# EAGLE board PCB_v19 (EAGLE 9.7.0)
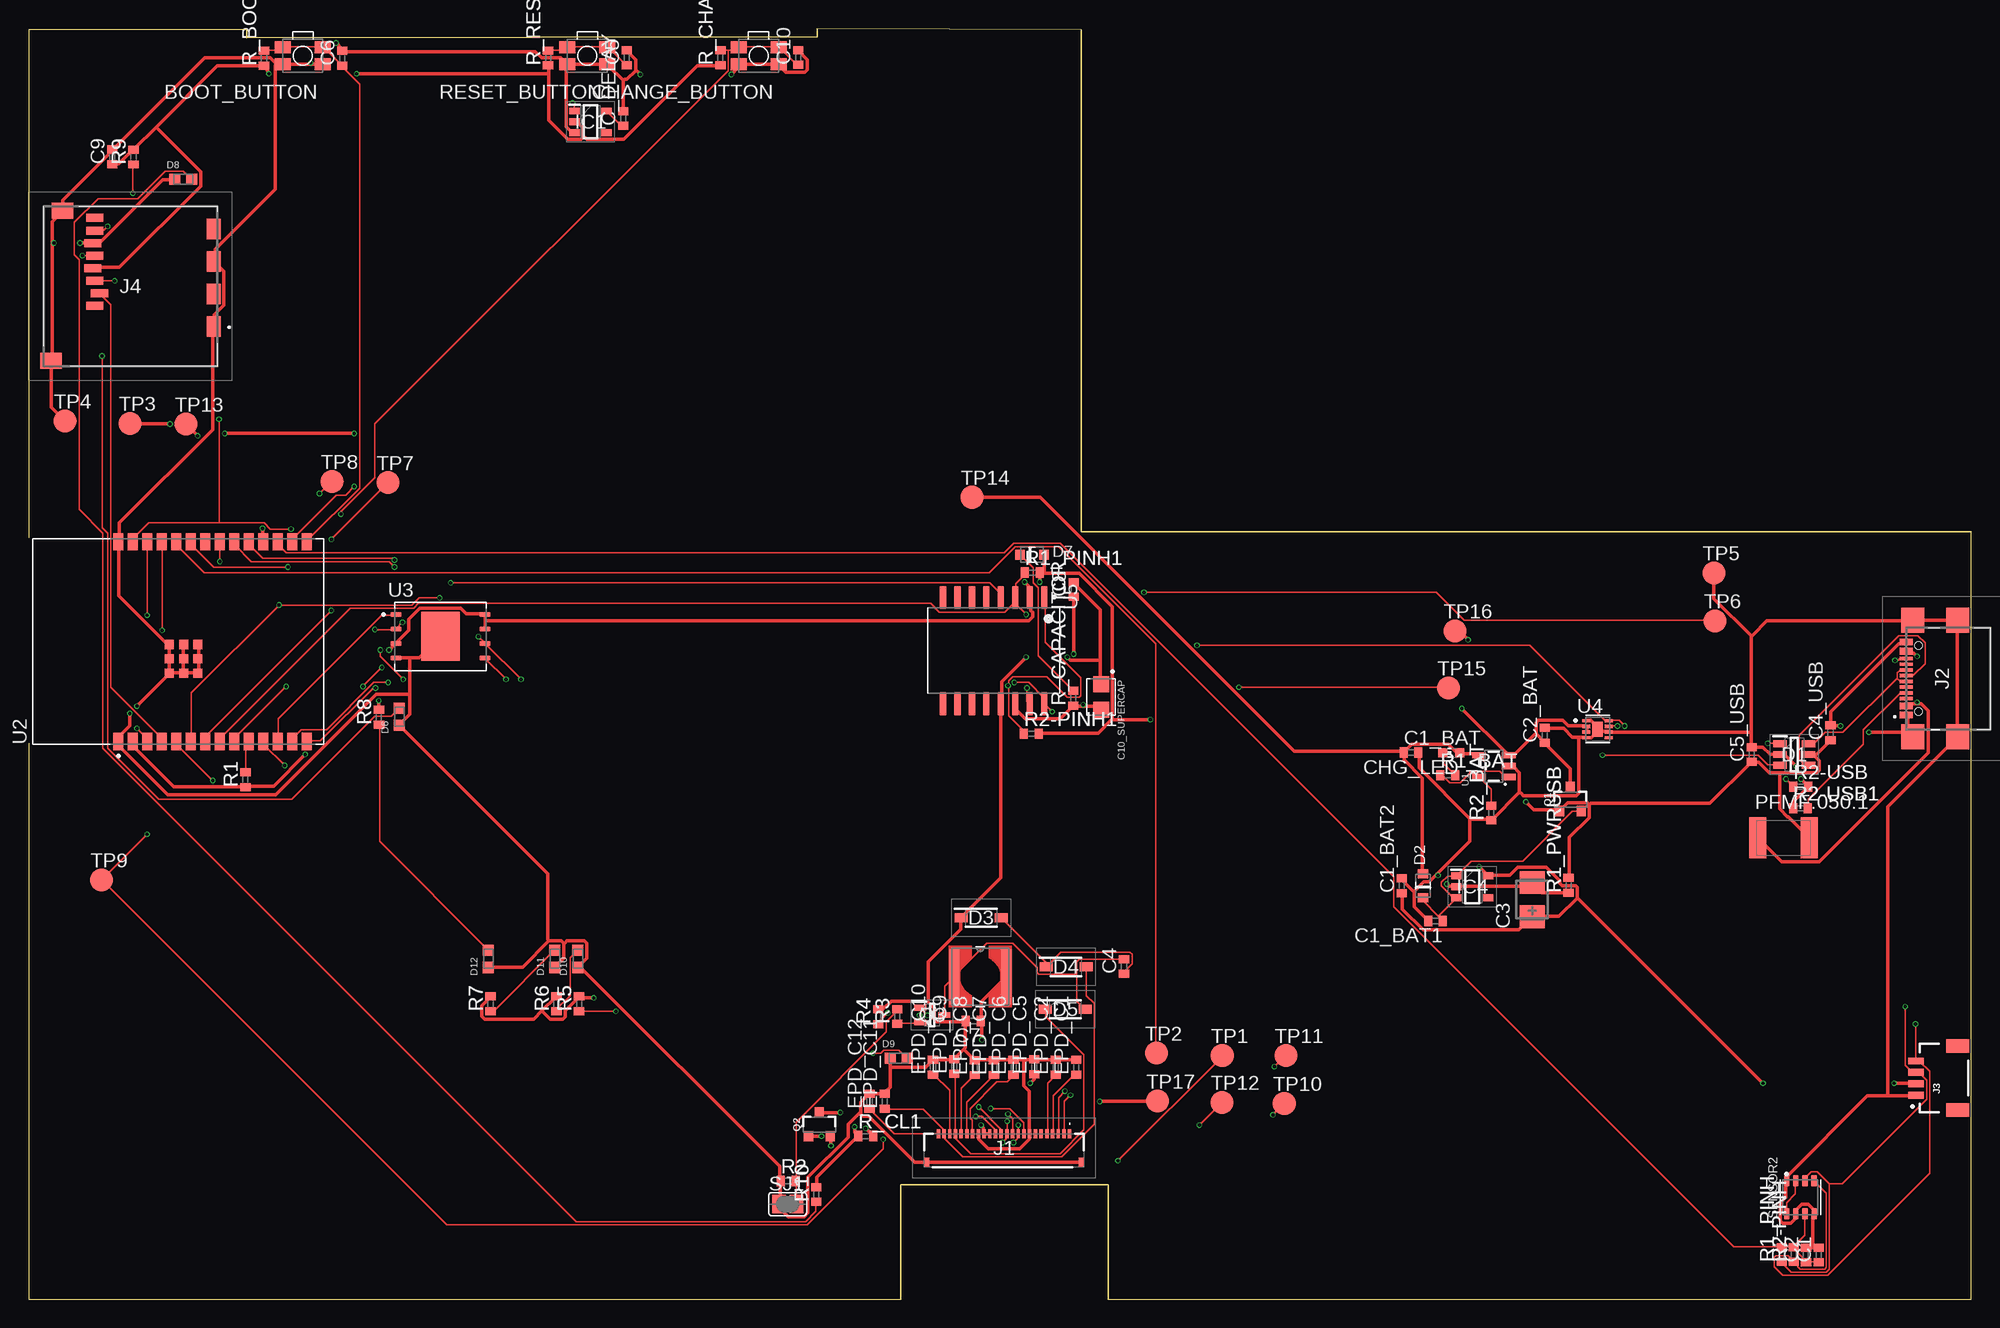
[diagram p0: board, top side]
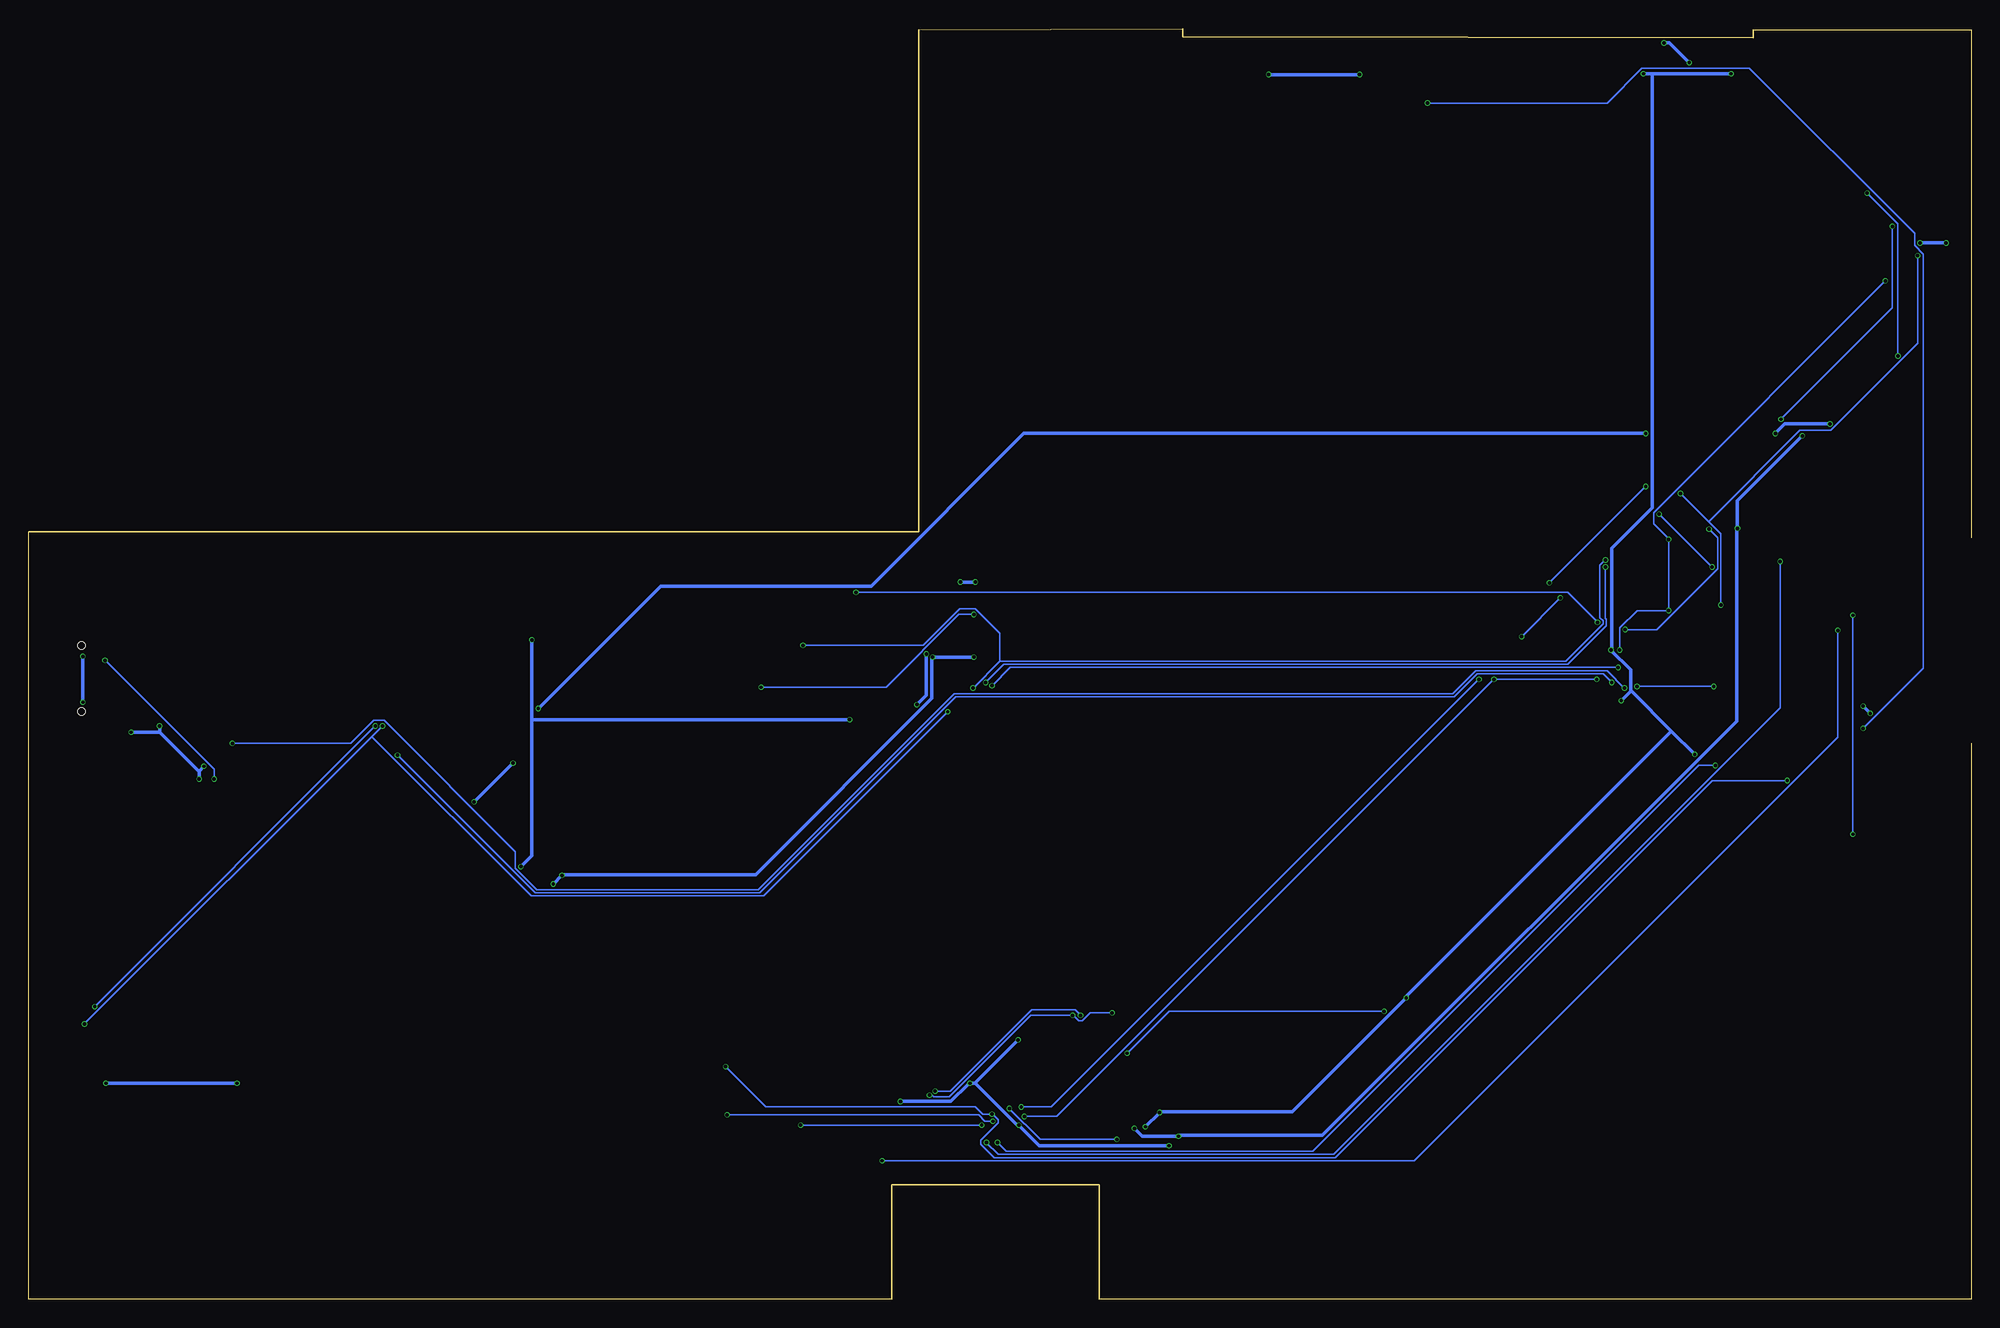
[diagram p1: board, bottom side, seen from below]

Size 170.2 x 111.3 mm. Coordinates in mm from the lower left corner, seen from the top.
Outline: 0,66.7 0,111.2 19.1,111.2 19.1,110.5 69.1,110.6 69.1,111.3 92.2,111.2 92.2,67.2 170.2,67.2 170.2,0 94.6,0 94.6,10 76.4,10 76.4,0 0,0 0,48.7
Copper layers (1*16): Top 0.035mm / dielectric 1.6mm / Bottom 0.035mm
Design rules "jlcpcb-2layers.dru": minimum track width 0.15mm, minimum drill 0.3mm, track to track 5mil, track to pad 5mil, pad to pad 5mil, via to via 5mil, smd to smd 5mil, copper to edge 0.15mm, drill to drill 6mil, minimum pad ring 10mil, minimum via ring 3mil, stop-mask expansion 4mil, vias tented up to drill 0mil, thermal gap 10mil
Net classes: 1 New Class: width 0.3 mm

## Footprints (pad centres in the part's own frame; a part is rotated, then mirrored left to right if it is on the bottom)
MYBUTTON = smd 1.4 x 1.05: 1 1.75,0.75; 2 -1.75,0.75; 3 -1.75,-0.75; 4 1.75,-0.75
EAGLE-LTSPICE_C0402 = smd 0.7 x 0.9: 1 -0.65,0; 2 0.65,0
RCL_CT3528 = smd 2 x 2.2: + -1.5,0; - 1.5,0
ESP32_WROVER_EAGLE-LTSPICE_C0402 = smd 0.7 x 0.9: 1 -0.65,0; 2 0.65,0
CAPCP3225X100N = smd 1.4 x 1.4: 1 -1.1,0; 2 1.1,0
ADAFRUIT_CHIP-LED0603 = smd 0.8 x 0.8: A 0,-0.75; C 0,0.75
SOT95P280X145-6N = smd 1.2 x 0.6: 1 -1.25,0.95; 2 -1.25,0; 3 -1.25,-0.95; 4 1.25,-0.95; 5 1.25,0; 6 1.25,0.95
ESP32_WROVER_AVX---SD0805S020S1R0_AVX_SD0805S020S1R0_0 = smd 0.8 x 0.9: 1 -1.05,0; 2 1.05,0
SOD3716X135N = smd 1.15 x 0.8: 1 -1.75,0; 2 1.75,0
DIOC1608X36N = smd 0.97 x 0.94: 1 -0.75,0; 2 0.75,0
SOT95P280X125-5N = smd 0.9 x 0.6: 1 -1.4,0.95; 2 -1.4,0; 3 -1.4,-0.95; 4 1.4,-0.95; 5 1.4,0.95
SOT95P280X120-5N = smd 0.9 x 0.6: 1 -1.4,0.95; 2 -1.4,0; 3 -1.4,-0.95; 4 1.4,-0.95; 5 1.4,0.95
FH34SRJ24S05SH99 = smd 0.3 x 0.8: 1 5.75,1.45; 2 5.25,1.45; 3 4.75,1.45; 4 4.25,1.45; 5 3.75,1.45; 6 3.25,1.45; 7 2.75,1.45; 8 2.25,1.45; 9 1.75,1.45; 10 1.25,1.45; 11 0.75,1.45; 12 0.25,1.45; 13 -0.25,1.45; 14 -0.75,1.45; 15 -1.25,1.45; 16 -1.75,1.45; 17 -2.25,1.45; 18 -2.75,1.45; 19 -3.25,1.45; 20 -3.75,1.45; 21 -4.25,1.45; 22 -4.75,1.45; 23 -5.25,1.45; 24 -5.75,1.45 | smd 0.4 x 0.8: MP1 6.75,-1.05; MP2 -6.75,-1.05
SAMACSYS_PARTS_USB4110GFA = smd 0.3 x 1.15: A1 -3.35,3.678; A4 -2.55,3.678; A5 -1.25,3.678; A6 -0.25,3.678; A7 0.25,3.678; A8 1.25,3.678; A9 2.55,3.678; A12 3.35,3.678; B1 3.05,3.678; B4 2.25,3.678; B5 1.75,3.678; B6 0.75,3.678; B7 -0.75,3.678; B8 -1.75,3.678; B9 -2.25,3.678; B12 -3.05,3.678 | smd 2.18 x 2: MP1 -5.11,-0.827; MP2 5.11,-0.827; MP3 -5.11,3.103; MP4 5.11,3.103 | hole 0.65: -2.89,2.603; 2.89,2.603
JST04_1MM_RA = smd 0.6 x 1.35: 1 -1.5,0; 2 -0.5,0; 3 0.5,0; 4 1.5,0 | smd 1.2 x 2: NC1 2.8,-3.675; NC2 -2.8,-3.675
112ATAARR03ATTEND = smd 1.8 x 1.2: G1 10.6,10.4; G2 4.9,10.4; S1 7.75,10.4; S2 2.05,10.4 | smd 1.4 x 1.9: G3 13.6,-3.85; G4 0.45,-2.85 | smd 0.7 x 1.5: P1 8.8,0; P2 7.7,0.4; P3 6.6,0; P4 5.5,-0.2; P5 4.4,0; P6 3.3,-0.2; P7 2.2,0; P8 1.1,0
IND_4828-WE-TPC_WRE = smd 0.889 x 4.826: 1 -2.286,0; 2 2.286,0
ESP32C6_VARISTOR_CT/CN1812 = smd 1.5 x 3.6: 1 -2.25,0; 2 2.25,0
ESP32_WROVER_SPARKFUN-DISCRETESEMI_SOT23-3 = smd 0.8 x 0.9: 1 -0.95,-1; 2 0.95,-1; 3 0,1.1
SOT65P210X110-3N = smd 1.05 x 0.5: 1 -1.05,0.65; 2 -1.05,-0.65; 3 1.05,0
ESP32_WROVER_EAGLE-LTSPICE_R0402 = smd 0.7 x 0.9: 1 -0.65,0; 2 0.65,0
ESP32_WROVER_BME680_PSON80P300X300X100-8N = smd 1.016 x 0.5: 1 1.458,1.2; 2 1.458,0.4; 3 1.458,-0.4; 4 1.458,-1.2; 5 -1.458,-1.22; 6 -1.458,-0.4; 7 -1.458,0.4; 8 -1.458,1.2
SJ = smd 1.168 x 1.6: 1 -0.762,0; 2 0.762,0
TP20R = smd 2 x 2: TP 0,0
ESP32_WROVER_SPARKFUN-IC-POWER_SOT23-5 = smd 0.55 x 1.2: 1 -0.95,-1.3; 2 0,-1.3; 3 0.95,-1.3; 4 0.95,1.3; 5 -0.95,1.3
XCVR_ESP32-C6-WROOM-1-N8 = smd 1.5 x 0.9: 1 -8.75,5.26; 2 -8.75,3.99; 3 -8.75,2.72; 4 -8.75,1.45; 5 -8.75,0.18; 6 -8.75,-1.09; 7 -8.75,-2.36; 8 -8.75,-3.63; 9 -8.75,-4.9; 10 -8.75,-6.17; 11 -8.75,-7.44; 12 -8.75,-8.71; 13 -8.75,-9.98; 14 -8.75,-11.25; 15 8.75,-11.25; 16 8.75,-9.98; 17 8.75,-8.71; 18 8.75,-7.44; 19 8.75,-6.17; 20 8.75,-4.9; 21 8.75,-3.63; 22 8.75,-2.36; 23 8.75,-1.09; 24 8.75,0.18; 25 8.75,1.45; 26 8.75,2.72; 27 8.75,3.99; 28 8.75,5.26 | smd 0.8 x 0.8: 29_1 -2.755,0.79; 29_2 -1.505,0.79; 29_3 -0.255,0.79; 29_4 -2.755,-0.46; 29_5 -1.505,-0.46; 29_6 -0.255,-0.46; 29_7 -2.755,-1.71; 29_8 -1.505,-1.71; 29_9 -0.255,-1.71
SON127P600X800X80-9N = smd 0.94 x 0.44: 1 -3.895,1.905; 2 -3.895,0.635; 3 -3.895,-0.635; 4 -3.895,-1.905; 5 3.895,-1.905; 6 3.895,-0.635; 7 3.895,0.635; 8 3.895,1.905 | smd 3.4 x 4.3: 9 0,0
SON50P200X200X80-9N = smd 0.76 x 0.27: 1 -0.985,0.75; 2 -0.985,0.25; 3 -0.985,-0.25; 4 -0.985,-0.75; 5 0.985,-0.75; 6 0.985,-0.25; 7 0.985,0.25; 8 0.985,0.75 | smd 0.9 x 1.3: 9 0,0
SOIC127P1032X265-16N = smd 2.05 x 0.59: 1 -4.655,4.445; 2 -4.655,3.175; 3 -4.655,1.905; 4 -4.655,0.635; 5 -4.655,-0.635; 6 -4.655,-1.905; 7 -4.655,-3.175; 8 -4.655,-4.445; 9 4.655,-4.445; 10 4.655,-3.175; 11 4.655,-1.905; 12 4.655,-0.635; 13 4.655,0.635; 14 4.655,1.905; 15 4.655,3.175; 16 4.655,4.445

## Placement (x,y rotation side)
BOOT_BUTTON  [MYBUTTON]  24.03,108.91 180 top
C1  100nF  [EAGLE-LTSPICE_C0402]  156.82,3.86 90 top
C1_BAT  4.7uF  [EAGLE-LTSPICE_C0402]  121.11,47.88 0 top
C1_BAT1  4.7uF  [EAGLE-LTSPICE_C0402]  123.25,33.12 180 top
C1_BAT2  4.7uF  [EAGLE-LTSPICE_C0402]  120.29,36.22 90 top
C2  100nF  [EAGLE-LTSPICE_C0402]  155.7,3.86 90 top
C2_BAT  4.7uF  [EAGLE-LTSPICE_C0402]  132.82,49.38 90 top
C3  100uF TANT  [RCL_CT3528]  131.71,35 90 top
C4  4.7uF/25V  [EAGLE-LTSPICE_C0402]  95.96,29.14 90 top
C4_USB  100nF  [EAGLE-LTSPICE_C0402]  157.85,49.6 90 top
C5  1uF  [EAGLE-LTSPICE_C0402]  52.41,108.74 90 top
C5_USB  4.7uF  [EAGLE-LTSPICE_C0402]  150.96,47.7 90 top
C6  100nF  [EAGLE-LTSPICE_C0402]  27.48,108.68 90 top
C7  10uF  [EAGLE-LTSPICE_C0402]  82.77,24.36 180 top
C8  100nF  [EAGLE-LTSPICE_C0402]  91.56,62.16 90 top
C9  100nF  [ESP32_WROVER_EAGLE-LTSPICE_C0402]  7.34,100.06 90 top
C10  100nF  [EAGLE-LTSPICE_C0402]  67.42,108.76 90 top
C10_SUPERCAP  CPH3225A  [CAPCP3225X100N]  93.95,52.74 270 top
C_DELAY  100nF  [EAGLE-LTSPICE_C0402]  52.09,103.42 90 top
CHANGE_BUTTON  [MYBUTTON]  63.96,108.91 180 top
CHG_LED  [ADAFRUIT_CHIP-LED0603]  124.64,47.85 90 top
D1  USBLC6-2SC6Y  [SOT95P280X145-6N]  154.68,47.7 0 top
D2  ESP32_WROVER_AVX---SD0805S020S1R0_AVX_SD0805S020S1R0_0_0AVX_SD0805S020S1R0_0_0  [ESP32_WROVER_AVX---SD0805S020S1R0_AVX_SD0805S020S1R0_0]  122.15,36.21 90 top
D3  MBR0530  [SOD3716X135N]  83.45,33.4 0 top
D4  MBR0530  [SOD3716X135N]  90.89,29.1 0 top
D5  MBR0530  [SOD3716X135N]  90.82,25.38 0 top
D6  PGB1010603MR  [DIOC1608X36N]  32.48,51 90 top
D7  SD0805S020S1R0  [ESP32_WROVER_AVX---SD0805S020S1R0_AVX_SD0805S020S1R0_0]  87.9,65.21 0 top
D8  PGB1010603MR  [DIOC1608X36N]  13.56,98.1 0 top
D9  PGB1010603MR  [DIOC1608X36N]  76.24,21.1 0 top
D10  PGB1010603MR  [DIOC1608X36N]  48.12,29.8 90 top
D11  PGB1010603MR  [DIOC1608X36N]  46.1,29.8 90 top
D12  PGB1010603MR  [DIOC1608X36N]  40.28,29.8 90 top
EPD_C1  1uF/50V  [EAGLE-LTSPICE_C0402]  91.77,20.3 90 top
EPD_C2  1uF/50V  [EAGLE-LTSPICE_C0402]  89.98,20.3 90 top
EPD_C5  0.1uF/50V  [EAGLE-LTSPICE_C0402]  88.1,20.34 90 top
EPD_C6  1uF/50V  [EAGLE-LTSPICE_C0402]  86.29,20.3 90 top
EPD_C7  1uF/50V  [EAGLE-LTSPICE_C0402]  84.58,20.28 90 top
EPD_C8  1uF/50V  [EAGLE-LTSPICE_C0402]  82.89,20.28 90 top
EPD_C9  1uF/50V  [EAGLE-LTSPICE_C0402]  81.1,20.38 90 top
EPD_C10  1uF/50V  [EAGLE-LTSPICE_C0402]  79.23,20.32 90 top
EPD_C11  1uF/50V  [EAGLE-LTSPICE_C0402]  75.01,17.32 90 top
EPD_C12  1uF/50V  [EAGLE-LTSPICE_C0402]  73.67,17.32 90 top
IC1  BD5229G-TR  [SOT95P280X125-5N]  49.23,103.12 0 top
IC4  XC6220A331MR-G  [SOT95P280X120-5N]  126.47,36.12 0 top
J1  FH34SRJ-24S-0.5SH_99_  [FH34SRJ24S05SH99]  85.45,13.02 0 top
J2  SAMACSYS_PARTS_USB4110-GF-A  [SAMACSYS_PARTS_USB4110GFA]  168.17,54.36 90 top
J3  QWIIC_RIGHT_ANGLE  [JST04_1MM_RA]  165.32,19.36 90 top
J4  112A-TAAR-R03_ATTEND  [112ATAARR03ATTEND]  5.82,95.81 270 top
L1  68uH  [IND_4828-WE-TPC_WRE]  83.37,28.25 0 top
PFMF.050.1  ESP32C6_VARISTORCN1812  [ESP32C6_VARISTOR_CT/CN1812]  153.74,40.4 0 top
Q1  20V/4.2A/52mΩ/1.4W  [ESP32_WROVER_SPARKFUN-DISCRETESEMI_SOT23-3]  135.06,43.76 0 top
Q2  20V/4.2A/52mΩ/1.4W  [ESP32_WROVER_SPARKFUN-DISCRETESEMI_SOT23-3]  69.28,15.26 0 top
Q3  SI1308EDL-T1-GE3  [SOT65P210X110-3N]  79.15,24.88 0 top
R1  [ESP32_WROVER_EAGLE-LTSPICE_R0402]  19,45.5 90 top
R1_BAT  200  [ESP32_WROVER_EAGLE-LTSPICE_R0402]  124.33,45.88 0 top
R1_PINH  10K  [ESP32_WROVER_EAGLE-LTSPICE_R0402]  153.58,3.9 90 top
R1_PINH1  10K  [ESP32_WROVER_EAGLE-LTSPICE_R0402]  87.92,63.64 0 top
R1_PWRUSB  100K  [ESP32_WROVER_EAGLE-LTSPICE_R0402]  134.91,36.24 90 top
R2  2.2  [ESP32_WROVER_EAGLE-LTSPICE_R0402]  66.55,10.34 0 top
R2-PINH  10K  [ESP32_WROVER_EAGLE-LTSPICE_R0402]  154.64,3.9 90 top
R2-PINH1  10K  [ESP32_WROVER_EAGLE-LTSPICE_R0402]  87.85,49.52 0 top
R2-USB  5k1  [ESP32_WROVER_EAGLE-LTSPICE_R0402]  155.25,44.88 0 top
R2-USB1  5K1  [ESP32_WROVER_EAGLE-LTSPICE_R0402]  155.22,43 0 top
R2_BAT  2K  [ESP32_WROVER_EAGLE-LTSPICE_R0402]  128.14,42.58 90 top
R3  0.47  [ESP32_WROVER_EAGLE-LTSPICE_R0402]  76.09,24.76 90 top
R4  10k  [ESP32_WROVER_EAGLE-LTSPICE_R0402]  74.43,24.74 90 top
R5  10K  [ESP32_WROVER_EAGLE-LTSPICE_R0402]  48.23,25.86 90 top
R6  10K  [ESP32_WROVER_EAGLE-LTSPICE_R0402]  46.25,25.86 90 top
R7  10K  [ESP32_WROVER_EAGLE-LTSPICE_R0402]  40.47,25.86 90 top
R8  10K  [ESP32_WROVER_EAGLE-LTSPICE_R0402]  30.69,50.96 90 top
R9  10K  [ESP32_WROVER_EAGLE-LTSPICE_R0402]  9.19,100.04 90 top
R10  10K  [ESP32_WROVER_EAGLE-LTSPICE_R0402]  69.01,9.16 90 top
R_BOOT  10K  [ESP32_WROVER_EAGLE-LTSPICE_R0402]  20.63,108.7 90 top
R_CAPACITOR  15  [ESP32_WROVER_EAGLE-LTSPICE_R0402]  91.51,52.64 90 top
R_CHANGE  10K  [ESP32_WROVER_EAGLE-LTSPICE_R0402]  60.61,108.74 90 top
R_CL1  10k  [ESP32_WROVER_EAGLE-LTSPICE_R0402]  73.33,14.28 0 top
R_RESET  10K  [ESP32_WROVER_EAGLE-LTSPICE_R0402]  45.51,108.72 90 top
RESET_BUTTON  [MYBUTTON]  48.95,108.91 180 top
SENSOR2  BME688  [ESP32_WROVER_BME680_PSON80P300X300X100-8N]  155.21,8.92 90 top
SJ1  [SJ]  66.5,8.32 0 top
TP1  TPTP20R  [TP20R]  104.57,21.34 0 top
TP2  TPTP20R  [TP20R]  98.79,21.54 0 top
TP3  TPTP20R  [TP20R]  8.89,76.72 0 top
TP4  TPTP20R  [TP20R]  3.21,76.92 0 top
TP5  TPTP20R  [TP20R]  147.63,63.62 0 top
TP6  TPTP20R  [TP20R]  147.75,59.42 0 top
TP7  TPTP20R  [TP20R]  31.47,71.52 0 top
TP8  TPTP20R  [TP20R]  26.59,71.62 0 top
TP9  TPTP20R  [TP20R]  6.41,36.72 0 top
TP10  TPTP20R  [TP20R]  110,17.14 0 top
TP11  TPTP20R  [TP20R]  110.15,21.34 0 top
TP12  TPTP20R  [TP20R]  104.55,17.24 0 top
TP13  TPTP20R  [TP20R]  13.8,76.64 0 top
TP14  TPTP20R  [TP20R]  82.65,70.24 0 top
TP15  TPTP20R  [TP20R]  124.4,53.54 0 top
TP16  TPTP20R  [TP20R]  124.95,58.54 0 top
TP17  TPTP20R  [TP20R]  98.9,17.34 0 top
U1  MCP73831  [ESP32_WROVER_SPARKFUN-IC-POWER_SOT23-5]  128.36,46.69 90 top
U2  ESP32-C6-WROOM-1-N8  [XCVR_ESP32-C6-WROOM-1-N8]  13.13,57.59 90 top
U3  W25Q512JVEIQ  [SON127P600X800X80-9N]  36.09,58.06 0 top
U4  MAX17048G+T10  [SON50P200X200X80-9N]  137.45,49.92 0 top
U5  DS3231SN#  [SOIC127P1032X265-16N]  84.55,56.8 270 top

## Library data of the parts
BOOT_BUTTON CHANGE_BUTTON CHG_LED PFMF.050.1 RESET_BUTTON SJ1 TP1-TP17 = DeskAssistant v19 v1
C1 C1_BAT C1_BAT1 C1_BAT2 C2 C2_BAT C4 C4_USB C5 C5_USB C6-C10 C_DELAY EPD_C1 EPD_C2 EPD_C5-EPD_C12 = DeskAssistant v19 v1; SPICEMODEL: NONE; SPICEPREFIX: C
C3 = DeskAssistant v19 v1; SPICEPREFIX: C
C10_SUPERCAP = DeskAssistant v19 v1; AVAILABILITY: Not in stock; CHECK_PRICES: https://www.snapeda.com/parts/CPH3225A/Seiko+Instruments/view-part/?ref=eda; DESCRIPTION: 11 mF (EDLC) Supercapacitor 3.3 V 1210 (3225 Metric) - -; MF: Seiko Instruments; MP: CPH3225A; PACKAGE: 1210 Seiko; PRICE: None; PURCHASE-URL: https://www.snapeda.com/api/url_track_click_mouser/?unipart_id=562593&manufacturer=Seiko Instruments&part_name=CPH3225A&search_term=None; SNAPEDA_LINK: https://www.snapeda.com/parts/CPH3225A/Seiko+Instruments/view-part/?ref=snap
D1 = DeskAssistant v19 v1; AVAILABILITY: In Stock; CHECK_PRICES: https://www.snapeda.com/parts/USBLC6-2SC6Y/STMicroelectronics/view-part/?ref=eda; DESCRIPTION: 17V Clamp 5A (8/20µs) Ipp Tvs Diode Surface Mount SOT-23-6; MF: STMicroelectronics; MP: USBLC6-2SC6Y; PACKAGE: SOT-23-6 STMicroelectronics; PRICE: None; SNAPEDA_LINK: https://www.snapeda.com/parts/USBLC6-2SC6Y/STMicroelectronics/view-part/?ref=snap
D2 D7 = DeskAssistant v19 v1; CENTROID_NOT_SPECIFIED: No; DATASHEET: http://datasheets.avx.com/schottky.pdf; DIGIKEY_DESCRIPTION: DIODE SCHOTTKY 20V 1A 0805; DIGIKEY_PART_NUMBER: 478-7800-1-ND; LEAD_FREE: yes; MANUFACTURER: SD0805S020S1R0; MF: AVX; MOUSER_PART_NUMBER: 581-SD0805S020S1R0; PACKAGE: 0805 (2012 metric); PREFIX: D; ROHS: yes; TEMPERATURE_RANGE_HIGH: +125°C; TEMPERATURE_RANGE_LOW: -55°C
D3-D5 = DeskAssistant v19 v1; AVAILABILITY: In Stock; CHECK_PRICES: https://www.snapeda.com/parts/MBR0530/Onsemi/view-part/?ref=eda; DESCRIPTION: Diode Schottky 30 V 500mA Surface Mount SOD-123; MF: ON Semiconductor; MP: MBR0530; PACKAGE: SOD-123-2 ON Semiconductor; PRICE: None; PURCHASE-URL: https://www.snapeda.com/api/url_track_click_mouser/?unipart_id=179458&manufacturer=ON Semiconductor&part_name=MBR0530&search_term=None; SNAPEDA_LINK: https://www.snapeda.com/parts/MBR0530/Onsemi/view-part/?ref=snap
D6 D8-D12 = DeskAssistant v19 v1; AVAILABILITY: In Stock; CHECK_PRICES: https://www.snapeda.com/parts/PGB1010603MR/Littelfuse/view-part/?ref=eda; DESCRIPTION: 150V (Typ) Clamp - Ipp Tvs Diode Surface Mount 0603 (1608 Metric); MF: Littelfuse Inc.; MP: PGB1010603MR; PACKAGE: 0603 Littelfuse Inc.; PRICE: None; PURCHASE-URL: https://www.snapeda.com/api/url_track_click_mouser/?unipart_id=5659453&manufacturer=Littelfuse Inc.&part_name=PGB1010603MR&search_term=None; SNAPEDA_LINK: https://www.snapeda.com/parts/PGB1010603MR/Littelfuse/view-part/?ref=snap
IC1 = DeskAssistant v19 v1; DESCRIPTION: Voltage Detector with Adjustable Delay Time: CMOS processes are utilized to develop high precision, low current consumption CMOS reset ICs that allow arbitrary setting of the delay time. The extensive lineup includes both Nch Open Drain and CMOS output types in a wide range of detection voltages (from 2.3V to 6.0V, in 0.1V steps), enabling selection of the ideal solution based on customer requirements. In addition, the entire series is of course both lead-free and RoHS-compliant.; HEIGHT: 1.25mm; MANUFACTURER_NAME: ROHM Semiconductor; MANUFACTURER_PART_NUMBER: BD5229G-TR; MOUSER_PART_NUMBER: 755-BD5229G-TR; MOUSER_PRICE-STOCK: https://www.mouser.co.uk/ProductDetail/ROHM-Semiconductor/BD5229G-TR?qs=4kLU8WoGk0vvnhrrYwdszw%3D%3D
IC4 = DeskAssistant v19 v1; DESCRIPTION: LDO Voltage Regulators; HEIGHT: 1.2mm; MANUFACTURER_NAME: Torex; MANUFACTURER_PART_NUMBER: XC6220A331MR-G; MOUSER_PART_NUMBER: 865-XC6220A331MR-G; MOUSER_PRICE-STOCK: https://www.mouser.co.uk/ProductDetail/Torex-Semiconductor/XC6220A331MR-G?qs=AsjdqWjXhJ8ZSWznL1J0gg%3D%3D
J1 = DeskAssistant v19 v1; DESCRIPTION: 24 Position FFC, FPC Connector Contacts, Top and Bottom 0.020" (0.50mm) Surface Mount, Right Angle; HEIGHT: 1.1mm; MANUFACTURER_NAME: Hirose; MANUFACTURER_PART_NUMBER: FH34SRJ-24S-0.5SH(99); MOUSER_PART_NUMBER: 798-FH34SRJ24S05SH99; MOUSER_PRICE-STOCK: https://www.mouser.co.uk/ProductDetail/Hirose-Connector/FH34SRJ-24S-0.5SH99?qs=vcbW%252B4%252BSTIpKBl5ap9J8Fw%3D%3D
J2 = DeskAssistant v19 v1; DESCRIPTION: CONN USB 2.0 TYPE-C R/A SMT; HEIGHT: 3.26mm; MANUFACTURER_NAME: GCT (GLOBAL CONNECTOR TECHNOLOGY); MANUFACTURER_PART_NUMBER: USB4110-GF-A; MOUSER_PART_NUMBER: 640-USB4110-GF-A; MOUSER_PRICE-STOCK: https://www.mouser.co.uk/ProductDetail/GCT/USB4110-GF-A?qs=KUoIvG%2F9IlYiZvIXQjyJeA%3D%3D
J3 = DeskAssistant v19 v1; PROD_ID: CONN-13694
J4 = DeskAssistant v19 v1; DESCRIPTION: Micro SD Card Socket, Push-Push Type, Top Mount, SMT, H=1.83mm, 10u; HEIGHT: 1.9mm; MANUFACTURER_NAME: ATTEND; MANUFACTURER_PART_NUMBER: 112A-TAAR-R03 ATTEND
L1 = DeskAssistant v19 v1; COPYRIGHT: Copyright (C) 2024 Ultra Librarian. All rights reserved.; MANUFACTURER_PART_NUMBER: 744043680; MFR_NAME: Wurth Electronics
Q1 Q2 = DeskAssistant v19 v1; MANUFACTURER: DMG2305UX-7; PROD_ID: TRAN-14388
Q3 = DeskAssistant v19 v1; AVAILABILITY: In Stock; CHECK_PRICES: https://www.snapeda.com/parts/SI1308EDL-T1-GE3/Vishay+Siliconix/view-part/?ref=eda; DESCRIPTION: Si1308EDL-T1-GE3 N-channel MOSFET Transistor, 1.5 A, 30 V, 3-Pin SC-70 | Siliconix / Vishay SI1308EDL-T1-GE3; MF: Vishay Siliconix; MP: SI1308EDL-T1-GE3; PACKAGE: SOT-323 Vishay Semiconductor; PRICE: None; PURCHASE-URL: https://www.snapeda.com/api/url_track_click_mouser/?unipart_id=274603&manufacturer=Vishay Siliconix&part_name=SI1308EDL-T1-GE3&search_term=None; SNAPEDA_LINK: https://www.snapeda.com/parts/SI1308EDL-T1-GE3/Vishay+Siliconix/view-part/?ref=snap
R1 R1_BAT R1_PINH R1_PINH1 R1_PWRUSB R2 R2-PINH R2-PINH1 R2-USB R2-USB1 R2_BAT R3-R10 R_BOOT R_CAPACITOR R_CHANGE R_CL1 R_RESET = DeskAssistant v19 v1; SPICEMODEL: NONE; SPICEPREFIX: R
SENSOR2 = DeskAssistant v19 v1; AVAILABILITY: Unavailable; DESCRIPTION: Integrated Environmental Unit; MF: Bosch Sensortec; MP: BME680; PACKAGE: LGA-8 Bosch Tools; PRICE: None
U1 = DeskAssistant v19 v1; PROD_ID: IC-09995
U2 = DeskAssistant v19 v1; AVAILABILITY: In Stock; CHECK_PRICES: https://www.snapeda.com/parts/ESP32-C6-WROOM-1-N8/Espressif+Systems/view-part/?ref=eda; DESCRIPTION: Multiprotocol Modules ESP32-C6 module, Wi-Fi 6 in 2.4 GHz band, Bluetooth 5, Zigbee 3.0 and Thread. ESP34-WROOM Compatible - ENGINEERING SAMPLE; MF: Espressif Systems; MP: ESP32-C6-WROOM-1-N8; PACKAGE: None; PRICE: None; SNAPEDA_LINK: https://www.snapeda.com/parts/ESP32-C6-WROOM-1-N8/Espressif+Systems/view-part/?ref=snap
U3 = DeskAssistant v19 v1; AVAILABILITY: In Stock; CHECK_PRICES: https://www.snapeda.com/parts/W25Q512JVEIQ/Winbond+Electronics/view-part/?ref=eda; DESCRIPTION: FLASH - NOR Memory IC 512Mb (64M x 8) SPI - Quad I/O 133 MHz 8-WSON (8x6); MF: Winbond Electronics; MP: W25Q512JVEIQ; PACKAGE: Package; PRICE: None; SNAPEDA_LINK: https://www.snapeda.com/parts/W25Q512JVEIQ/Winbond+Electronics/view-part/?ref=snap
U4 = DeskAssistant v19 v1; AVAILABILITY: In Stock; CHECK_PRICES: https://www.snapeda.com/parts/MAX17048G+T10/Analog+Devices/view-part/?ref=eda; DESCRIPTION: 3µA 1-Cell/2-Cell Fuel Gauge with ModelGauge; MF: Analog Devices; MP: MAX17048G+T10; PACKAGE: TDFN-8 Maxim; PRICE: None; PURCHASE-URL: https://www.snapeda.com/api/url_track_click_mouser/?unipart_id=329239&manufacturer=Analog Devices&part_name=MAX17048G+T10&search_term=None; SNAPEDA_LINK: https://www.snapeda.com/parts/MAX17048G+T10/Analog+Devices/view-part/?ref=snap
U5 = DeskAssistant v19 v1; AVAILABILITY: In Stock; CHECK_PRICES: https://www.snapeda.com/parts/DS3231SN%23/Analog+Devices/view-part/?ref=eda; DESCRIPTION: Extremely Accurate I²C-Integrated RTC/TCXO/Crystal; MF: Analog Devices; MP: DS3231SN#; PACKAGE: SOIC-16 Maxim; PRICE: None; PURCHASE-URL: https://www.snapeda.com/api/url_track_click_mouser/?unipart_id=99048&manufacturer=Analog Devices&part_name=DS3231SN#&search_term=None; SNAPEDA_LINK: https://www.snapeda.com/parts/DS3231SN%23/Analog+Devices/view-part/?ref=snap

## Nets
3V3 [New Class]: C1_BAT2.1 C3.+ C9.1 D7.2 IC1.2 IC4.5 J3.2 J4.P4 Q2.3 R1.1 R1_PINH1.2 R2-PINH1.2 R5.2 R6.2 R7.2 R8.2 R9.2 R10.2 R_BOOT.1 R_CHANGE.1 R_CL1.1 R_RESET.1 TP16.TP U2.2 U3.3 U3.7 U3.8 U5.2
32KHZ: R2-PINH1.1 U2.9 U5.1
DN: D1.4 J2.A7
DP: D1.6 J2.A6 J2.B6
EPD_3V3 [New Class]: C7.1 EPD_C5.1 J1.15 J1.16 L1.2 Q2.2 TP17.TP
EPD_3V3_C [New Class]: Q2.1 R_CL1.2 TP13.TP U2.18
EPD_BUSY: J1.9 TP9.TP U2.26
EPD_CS: J1.12 TP10.TP U2.11
EPD_DC: J1.11 TP11.TP U2.5
EPD_RST: J1.10 TP12.TP U2.21
FLASH_CS: U2.12 U3.1
GDR: J1.2 Q3.1 R4.1
GND: BOOT_BUTTON.1 BOOT_BUTTON.2 C1.2 C1_BAT1.2 C1_BAT2.2 C1_BAT.2 C2.2 C2_BAT.2 C3.- C4_USB.2 C5.2 C5_USB.2 C6.2 C7.2 C8.2 C9.2 C10.2 C10_SUPERCAP.1 C_DELAY.2 CHANGE_BUTTON.1 CHANGE_BUTTON.2 D1.2 D3.1 D6.1 D8.1 D9.1 D10.1 D11.1 D12.1 EPD_C1.2 EPD_C2.2 EPD_C5.2 EPD_C6.2 EPD_C7.2 EPD_C8.2 EPD_C9.2 EPD_C10.2 EPD_C11.2 EPD_C12.2 IC1.3 IC4.2 J1.8 J1.17 J1.MP1 J1.MP2 J2.A1 J2.A12 J2.B1 J2.B12 J2.MP1 J2.MP2 J2.MP3 J2.MP4 J3.1 J4.G1 J4.G2 J4.G3 J4.G4 J4.P6 R1_PWRUSB.1 R2-USB1.1 R2-USB.2 R2.1 R2_BAT.1 R4.2 RESET_BUTTON.1 RESET_BUTTON.2 SENSOR2.1 SENSOR2.5 SENSOR2.7 SJ1.1 TP4.TP TP5.TP U1.2 U2.1 U2.28 U2.29_1 U2.29_2 U2.29_3 U2.29_4 U2.29_5 U2.29_6 U2.29_7 U2.29_8 U2.29_9 U3.4 U3.9 U4.1 U4.4 U4.6 U4.9 U5.13
GPIO8: R1.2 U2.10
I2C_PW: C1.1 C2.1 R1_PINH.2 R2-PINH.2 SENSOR2.6 U2.17
INT_RTC: R1_PINH1.1 TP15.TP U2.8 U5.3
IO/BOOT: BOOT_BUTTON.3 BOOT_BUTTON.4 C6.1 R_BOOT.2 U2.15
IO/CHANGE: C10.1 CHANGE_BUTTON.3 CHANGE_BUTTON.4 R_CHANGE.2 U2.23
MISO: J4.P7 TP6.TP U2.27 U3.2
MOSI: J1.14 J4.P3 TP7.TP U2.7 U3.5
N$1: J2.A5 R2-USB1.2
N$2: C1_BAT1.1 D2.1 IC4.1 IC4.3 Q1.2
N$3: R1_BAT.1 U1.1
N$4: C4.1 D3.2 D4.1
N$5: CHG_LED.C R1_BAT.2
N$6: EPD_C12.1 J1.24
N$7: R2_BAT.2 U1.5
N$8: SENSOR2.2 SENSOR2.8
N$9: C_DELAY.1 IC1.5
N$10: EPD_C10.1 J1.22
N$11: EPD_C8.1 J1.20
N$12: J2.B7
N$13: EPD_C7.1 J1.19
N$14: J2.B5 R2-USB.1
N$15: EPD_C6.1 J1.18
N$16: D8.2 R10.1
N$17: D6.2 R9.1
N$18: C5.1 R_RESET.2 RESET_BUTTON.3 RESET_BUTTON.4
N$19: D9.2 R5.1
N$20: D10.2 R6.1
N$21: D11.2 R7.1
N$22: D12.2 R8.1
N$23: EPD_C2.1 J1.5
N$24: EPD_C1.1 J1.4
N$32: D7.1 R_CAPACITOR.2
PREVGH: D5.1 EPD_C9.1 J1.21
PREVGL: D4.2 EPD_C11.1 J1.23
RESE: J1.3 Q3.2 R3.1
RESE': R2.2 R3.2 SJ1.2
RESET: IC1.1 U2.3
RTC_RST: U2.16 U5.4
RX: TP2.TP U2.24
SCK: J1.13 J4.P5 TP8.TP U2.6 U3.6
SCL: J3.4 R2-PINH.1 SENSOR2.4 U2.20 U4.7 U5.16
SDA: J3.3 R1_PINH.1 SENSOR2.3 U2.19 U4.8 U5.15
SRC: C4.2 D5.2 L1.1 Q3.3
SS_SD: J4.P2 U2.4
TX: TP1.TP U2.25
USB_D+: D1.1 U2.14
USB_D-: D1.3 U2.13
VBAT: C2_BAT.1 Q1.3 TP3.TP U1.3 U4.2 U4.3
VBUS [New Class]: C1_BAT.1 C4_USB.1 C5_USB.1 CHG_LED.A D1.5 D2.2 PFMF.050.1.2 Q1.1 R1_PWRUSB.2 TP14.TP U1.4
VRTC: C8.1 C10_SUPERCAP.2 R_CAPACITOR.1 U5.14
VUSB [New Class]: J2.A4 J2.A9 J2.B4 J2.B9 PFMF.050.1.1

## Tracks (layer width: path | path; a pad name or v marks a point on that pad's centre or on a via)
3V3  (via drill 0.3)
  Top 0.3: 94.94,50.83 93.69,49.58 88.5,49.58 R2-PINH1.2 | 94.94,50.83 94.94,60.66 92.03,63.57 88.99,63.57 | 88.99,63.57 88.57,63.57 R1_PINH1.2 88.57,63.43 v88.57,62.81 | 88.99,63.57 88.99,65.16 D7.2 | v87.25,62.81 87.67,62.39 87.67,61.49 U5.2 87.81,61.35 87.81,60.32 87.95,60.18 87.95,59.76 87.6,59.42 40.03,59.42 | C1_BAT2.1 120.36,35.52 120.36,34.14 122.16,32.34 130.54,32.34 131.64,33.45 C3.+ 131.85,33.52 134.07,33.52 135.66,35.11 | 135.66,35.11 135.66,36.08 135.52,36.22 134.34,36.22 134.14,36.42 134.14,36.63 132.96,37.81 130.47,37.81 129.77,37.12 127.91,37.12 IC4.5 127.77,37.19 v127.07,37.88 | v163.43,18.91 165.3,18.91 J3.2 | v151.94,18.91 135.8,35.04 135.66,35.11 | v126.1,57.76 125.34,58.52 125,58.52 TP16.TP | v98.27,50.76 95.08,50.76 94.94,50.83 | 48.61,101.8 48.61,102.56 48.06,103.11 47.85,103.11 IC1.2 | 48.61,101.8 48.41,101.59 47.23,101.59 45.57,103.25 45.57,107.34 | 45.57,107.34 45.57,108.03 R_RESET.1 | R_CHANGE.1 60.59,108.03 58.59,108.03 52.15,101.59 48.89,101.59 48.75,101.73 48.61,101.8 | C9.1 7.34,99.44 7.89,99.44 9.14,100.69 R9.2 9.28,100.76 11.18,102.66 | 11.18,102.66 16.55,108.03 20.57,108.03 R_BOOT.1 20.64,107.89 21.05,107.48 v21.05,107.34 | 11.18,102.66 15.1,98.75 15.1,97.5 7.96,90.37 5.68,90.37 J4.P4 | v28.74,107.34 45.57,107.34 | U2.2 9.14,48.82 9.14,48.48 12.74,44.87 18.97,44.87 R1.1 19.11,44.94 21.47,44.94 v24.24,47.71 | 40.03,59.42 40.03,59.9 U3.8 39.89,60.04 38.36,60.04 37.88,60.52 34.28,60.52 33.31,59.55 33.31,58.59 32.27,57.55 U3.3 32.13,57.41 v31.58,56.85 | 40.03,59.42 40.03,58.72 U3.7 | v30.68,52.42 30.68,51.66 R8.2 | 44.98,25.24 46.19,26.45 R6.2
  Top 0.3: 44.98,25.24 44.25,24.52 39.96,24.52 39.68,24.79 39.68,25.69 40.44,26.45 R7.2 | 44.98,25.24 45.7,24.52 46.81,24.52 47.02,24.72 47.02,25.28 48.2,26.45 R5.2 48.34,26.38 v49.51,26.38 | R10.2 69.04,9.83 69.04,10.66 72.64,14.27 R_CL1.1 72.57,14.4 72.37,14.61 v72.37,15.1 | v71.12,16.34 69.32,16.34 Q2.3
  Bottom 0.3: v88.57,62.81 v87.25,62.81 | v151.94,18.91 v163.43,18.91 | 126.1,50.76 126.1,38.85 v127.07,37.88 | 126.1,50.76 v126.1,57.76 | 126.1,50.76 v98.27,50.76 | v21.05,107.34 27.98,107.34 | 27.98,107.34 v28.74,107.34 | 29.85,53.25 v30.68,52.42 | 29.85,53.25 29.85,55.12 v31.58,56.85 31.51,56.99 31.51,65.79 27.98,69.32 27.98,107.34 | 26.28,49.76 29.71,53.18 29.85,53.25 | 26.28,49.76 v24.24,47.71 | v72.37,15.1 v71.12,16.34 70.98,16.41 59.49,16.41 v49.51,26.38 49.51,26.52 26.28,49.76
32KHZ  (via drill 0.3)
  Top 0.15: 85.87,53.74 85.87,54.15 86.22,54.5 89.19,54.5 91,52.7 92.03,52.7 92.17,52.84 92.17,54.43 89.06,57.55 89.06,61.42 U5.1 | 85.87,53.74 85.87,51.11 87.19,49.79 87.19,49.58 R2-PINH1.1 | v22.58,53.67 18.07,49.17 18.07,48.89 U2.9 | v30.95,55.33 v29.29,53.67 | v85.8,53.74 85.87,53.74
  Bottom 0.15: v29.29,53.67 v22.58,53.67 | v30.95,55.33 84.21,55.33 v85.8,53.74
DN
  Top 0.15: J2.A7 164.54,54.64 165.09,54.64 166.13,55.68 166.13,57.48 165.51,58.1 163.84,58.1 155.12,49.38 155.12,47.3 155.6,46.81 155.88,46.81 D1.4
DP
  Top 0.15: 163.71,54.36 163.91,54.15 164.47,54.15 J2.A6 | 163.71,54.36 163.71,54.85 163.91,55.05 164.47,55.05 J2.B6 | D1.6 155.95,48.68 156.44,48.68 157.41,49.65 158.93,49.65 163.64,54.36 163.71,54.36
EPD_3V3  (via drill 0.3)
  Top 0.3: L1.2 85.59,28.18 83.45,26.04 83.45,24.38 C7.1 83.52,24.24 v83.52,22.71 | J1.15 84.14,14.47 83.72,14.47 J1.16 83.65,14.61 83.65,15.03 v83.45,15.23 | v70.29,13.43 70.29,14.2 Q2.2 | v87.74,18.91 88.09,19.25 88.09,19.67 EPD_C5.1 | v93.83,17.31 98.89,17.31 TP17.TP
  Bottom 0.3: v70.29,13.43 81.65,13.43 v83.45,15.23 83.58,15.23 87.25,18.91 | 87.25,18.91 v87.74,18.91 87.88,18.84 89.4,17.31 v93.83,17.31 | v83.52,22.71 87.19,19.04 87.25,18.91
EPD_3V3_C  (via drill 0.3)
  Top 0.3: v69.46,14.27 68.35,14.27 Q2.1 | v73.34,14.96 73.96,14.34 R_CL1.2 | v20.5,67.52 20.5,66.41 U2.18 | v14.82,75.62 13.85,76.59 TP13.TP
  Bottom 0.3: v73.34,14.96 72.64,14.27 v69.46,14.27 69.32,14.34 56.85,14.34 20.57,50.62 20.57,67.38 v20.5,67.52 20.5,69.94 v14.82,75.62
EPD_BUSY  (via drill 0.3)
  Top 0.15: v84.28,16.69 85.94,16.69 87.19,15.44 87.19,14.47 J1.9 | v74.86,13.99 74.86,13.16 68.21,6.51 36.63,6.51 6.44,36.7 TP9.TP 6.44,36.77 v10.39,40.72 | v10.39,59.9 10.39,66.34 U2.26
  Bottom 0.15: v84.28,16.69 81.58,13.99 v74.86,13.99 | v10.39,40.72 v10.39,59.9
EPD_CS  (via drill 0.3)
  Top 0.15: v85.73,15.58 85.73,14.47 J1.12 85.66,14.4 85.66,14.06 v85.32,13.71 | v109,16.14 109.97,17.11 TP10.TP | v22.44,46.74 20.57,48.61 20.57,48.82 U2.11
  Bottom 0.15: v85.73,15.58 86.42,15.58 86.98,16.14 v109,16.14 | v22.44,46.74 23.89,46.74 57.69,12.95 84.55,12.95 v85.32,13.71
EPD_DC  (via drill 0.3)
  Top 0.15: v85.8,16.2 86.22,15.79 86.22,14.47 J1.11 | v109.14,20.36 110.11,21.33 TP11.TP | v16.14,45.43 12.95,48.61 12.95,48.82 U2.5
  Bottom 0.15: v109.14,20.36 105.61,16.83 87.25,16.83 86.63,16.2 v85.8,16.2 85.73,16.2 85.25,15.72 85.25,15.44 86.77,13.92 86.77,13.57 85.59,12.4 55.75,12.4 22.71,45.43 v16.14,45.43
EPD_RST  (via drill 0.3)
  Top 0.15: v86.7,15.23 J1.10 86.63,14.4 86.63,14.06 v86.28,13.71 | v102.56,15.23 104.5,17.17 TP12.TP | v16.76,64.61 U2.21
  Bottom 0.15: v102.56,15.23 v86.7,15.23 | v16.76,64.61 16.76,51.8 55.88,12.67 85.25,12.67 v86.28,13.71
FLASH_CS
  Top 0.15: U3.1 32.13,59.9 30.95,59.9 21.88,50.83 21.88,48.89 U2.12
GDR  (via drill 0.3)
  Top 0.15: v91.27,17.87 90.72,17.31 90.72,14.47 J1.2 | v78.74,24.86 78.11,25.48 Q3.1 | v75.28,25.07 74.44,24.24 74.44,24.1 R4.1
  Bottom 0.15: v91.27,17.87 91.06,17.87 90.92,17.73 89.54,17.73 82.41,24.86 v78.74,24.86 78.67,24.86 78.18,24.38 77.91,24.38 77.21,25.07 v75.28,25.07
GND  (via drill 0.3)
  Top 0.3: C10.2 67.45,109.35 68.21,108.58 68.21,107.68 68,107.48 66.34,107.48 65.72,108.1 CHANGE_BUTTON.2 65.58,108.17 62.26,108.17 CHANGE_BUTTON.1 62.19,108.03 62.19,107.89 v61.56,107.27 | 52.08,106.78 52.08,104.08 C_DELAY.2 | 52.08,106.78 50.76,108.1 RESET_BUTTON.2 50.55,108.17 47.3,108.17 RESET_BUTTON.1 | 53.18,107.61 53.18,108.58 52.42,109.35 C5.2 | 53.18,107.61 52.42,106.85 52.22,106.85 52.08,106.78 | v53.6,107.27 53.32,107.55 53.18,107.61 | RESET_BUTTON.1 47.16,108.17 46.6,108.72 44.94,108.72 44.39,109.28 27.49,109.28 C6.2 27.49,109.48 v26.94,110.04 | IC1.3 47.78,102.21 47.58,102.21 47.09,102.7 47.09,108.03 RESET_BUTTON.1 | U2.29_1 12.33,54.85 12.33,56.02 U2.29_2 12.33,56.23 12.33,57.27 U2.29_3 12.19,57.34 7.89,61.63 7.89,66.34 U2.28 7.96,66.48 7.96,68 16.14,76.17 16.14,85.11 J4.G1 16.27,85.25 16.27,86.22 17.11,87.05 17.11,90.03 16.27,90.86 J4.G2 16.34,91 16.34,91.96 21.61,97.23 21.61,108.1 BOOT_BUTTON.1 | U2.29_4 13.57,54.85 12.46,54.85 U2.29_1 | U2.29_4 13.57,54.98 13.57,56.02 U2.29_5 13.57,56.23 13.57,57.27 U2.29_6 | U2.29_4 13.71,54.85 14.82,54.85 U2.29_7 14.89,54.98 14.89,56.02 U2.29_8 14.89,56.23 14.89,57.27 U2.29_9 | D8.1 12.74,98.06 11.77,98.06 6.23,92.52 5.68,92.52 J4.P6 5.47,92.52 v4.5,92.52 | TP4.TP 3.19,76.94 2.01,78.11 2.01,82.2 J4.G3 2.08,82.34 2.08,92.52 | 24.72,108.17 25.76,108.17 BOOT_BUTTON.2 | 24.72,108.17 22.3,108.17 BOOT_BUTTON.1 | BOOT_BUTTON.1 22.16,108.24 21.68,108.24 21.19,108.72 15.44,108.72 7.48,100.76 C9.2 7.27,100.69 7.27,100.55 2.98,96.26 2.98,95.43 J4.G4 2.91,95.22 2.08,94.39 2.08,92.52 | v2.22,92.52 2.08,92.52
  Top 0.3: v24.72,108.31 24.72,108.17 | R1_PWRUSB.1 132.54,35.59 131.78,36.36 C3.- 131.64,36.49 131.3,36.15 125.14,36.15 IC4.2 124.93,36.15 124.44,36.15 v124.23,36.36 | U4.9 137.39,49.86 137.39,49.65 136.91,49.17 136.49,49.17 U4.4 136.35,49.24 135.8,49.24 | U4.1 136.49,50.69 136.84,50.69 137.46,50.07 U4.9 | U4.9 137.53,49.72 138.43,49.72 U4.6 138.57,49.65 150.9,49.65 | 135.8,49.24 135.25,49.24 134.48,50 132.82,50 C2_BAT.2 | 121.36,35.7 121.39,35.66 121.39,34.35 122.57,33.17 C1_BAT1.2 | 121.36,35.7 120.36,36.7 120.36,36.84 C1_BAT2.2 | 130.61,44.39 128.18,41.97 R2_BAT.1 128.04,42.03 126.31,42.03 | 130.61,44.39 130.61,46.12 130.05,46.67 129.71,46.67 U1.2 | 126.31,42.03 121.81,46.54 121.81,47.85 C1_BAT.2 | 121.36,35.7 122.23,36.56 122.71,36.56 123.37,37.22 | 123.37,37.22 126.24,40.1 126.24,41.9 126.31,42.03 | 135.8,49.24 135.8,44.32 135.59,44.11 130.95,44.11 130.74,44.32 130.61,44.39 | v123.47,37.12 123.37,37.22 | 156.3,4.5 156.78,4.5 C1.2 | 156.3,4.5 155.74,4.5 C2.2 | 156.3,4.5 156.3,7.34 SENSOR2.5 156.37,7.48 156.37,7.83 155.88,8.31 155.33,8.31 154.84,7.83 154.84,7.48 SENSOR2.7 154.7,7.34 154.7,6.99 154.36,6.65 153.67,6.65 153.46,6.86 153.46,8.45 153.94,8.93 153.94,10.32 SENSOR2.1 154.01,10.53 154.01,10.73 161.08,17.8 162.88,17.8 | 162.88,17.8 165.3,17.8 J3.1 | J2.A12 164.54,57.69 164.54,57.55 J2.B1 164.47,57.41 163.84,57.41 157.89,51.45 157.89,50.28 C4_USB.2 158.03,50.21 v158.72,50.21 | J2.B12 164.54,51.24 164.54,51.04 J2.A1 164.61,50.9 164.61,49.72 165.02,49.31 J2.MP3 164.47,49.65 v161.21,49.65 | R2-USB1.1 154.63,43 154.63,43.63 155.88,44.87 R2-USB.2 155.81,45.01 v155.26,45.57
  Top 0.3: v154.84,46.67 153.87,47.64 153.53,47.64 D1.2 153.39,47.71 152.56,47.71 151.94,48.34 150.97,48.34 C5_USB.2 150.9,48.48 150.9,49.65 | 150.9,58.1 147.64,61.35 147.64,63.57 TP5.TP | 150.9,49.65 150.9,58.1 | 150.9,58.1 151.03,58.17 152.28,59.42 164.95,59.42 J2.MP4 165.09,59.49 168.83,59.49 J2.MP2 168.97,59.42 168.97,49.31 J2.MP1 168.9,49.17 162.88,43.14 162.88,17.8 | 45.57,31.37 43.28,29.09 40.3,29.09 D12.1 | 45.57,31.37 46.67,31.37 46.88,31.16 | 46.88,31.16 46.88,29.85 46.12,29.09 D11.1 | 46.88,31.16 47.02,31.23 47.16,31.37 48.68,31.37 48.89,31.16 48.89,29.85 48.13,29.09 D10.1 48.34,29.09 65.79,11.63 65.79,10.46 R2.1 65.86,10.32 65.86,8.45 65.79,8.38 SJ1.1 65.72,8.17 65.72,8.03 66.55,7.2 67.93,7.2 68.28,7.55 68.28,10.66 71.81,14.2 71.81,15.3 72.78,16.27 72.92,16.2 | 33.38,56.16 34.21,56.16 36.08,58.03 U3.9 | 33.38,56.16 U3.4 | 33.38,56.16 33.38,52.98 | 33.38,52.98 33.38,51.24 32.55,50.41 32.55,50.28 D6.1 32.62,50.14 45.5,37.26 45.5,31.51 45.57,31.37 | 33.38,52.98 30.47,52.98 21.68,44.18 12.19,44.18 7.89,48.48 7.89,48.82 U2.1 7.96,48.96 7.96,49.31 8.86,50.21 v8.86,51.31 | 72.92,16.2 73.13,16 73.61,16 77.63,11.98 78.67,11.98 J1.MP2 78.81,11.98 92.17,11.98 J1.MP1 | 72.92,16.2 72.92,17.24 73.61,17.94 EPD_C12.2 73.82,18 75,18 EPD_C11.2 75.07,18.14 75.48,18.56 75.48,20.29 | 75.48,20.29 75.48,21.05 D9.1 | 93.9,55.95 93.9,53.88 C10_SUPERCAP.1 | 93.9,55.95 93.9,60.39 91.62,62.67 91.62,62.81 C8.2 | J1.17 83.24,14.4 83.24,13.99 84.07,13.16 86.84,13.16 87.67,13.99 87.67,14.4 J1.8 87.67,14.61 87.67,18.21 87.19,18.7 87.19,20.98 | 81.92,21.88 81.16,21.12 EPD_C9.2 81.09,20.98 79.29,20.98 EPD_C10.2 79.15,20.84 78.6,20.29 75.48,20.29
  Top 0.3: 81.92,21.88 82.06,22.02 82.06,24.31 C7.2 81.92,24.31 79.57,24.31 79.36,24.52 79.36,25.48 78.74,26.11 | 78.74,26.11 75.55,26.11 74.86,25.41 74.44,25.41 R4.2 | 81.92,21.88 82.82,20.98 EPD_C8.2 83.03,20.98 84.55,20.98 EPD_C7.2 84.69,20.98 86.28,20.98 EPD_C6.2 86.42,20.98 87.19,20.98 | 87.19,20.98 88.09,20.98 EPD_C5.2 88.22,20.98 89.96,20.98 EPD_C2.2 90.09,20.98 91.76,20.98 EPD_C1.2 | 78.74,26.11 78.81,26.25 78.81,29.57 81.65,32.41 81.65,33.38 D3.1 81.78,33.52 85.18,36.91 85.18,52.08 U5.13 85.25,52.28 85.25,54.08 v87.39,56.23 | 93.9,55.95 91.27,55.95 v91,56.23 | v9.49,51.94 12.26,54.71 U2.29_1
  Bottom 0.3: v53.6,107.27 v61.56,107.27 | v2.22,92.52 v4.5,92.52 | v26.94,110.04 26.45,110.04 v24.72,108.31 | v124.23,36.36 v123.47,37.12 123.33,37.19 106.51,37.19 91.06,52.63 91.06,56.09 v91,56.23 v87.39,56.23 | 155.26,46.26 v155.26,45.57 | v154.84,46.67 155.26,46.26 | 158.72,49.65 v161.21,49.65 | 158.72,49.65 155.4,46.33 155.26,46.26 | 158.72,49.65 v158.72,50.21 | v8.86,51.31 v9.49,51.94
GPIO8
  Top 0.15: R1.2 19.04,46.19 19.04,48.61 19.25,48.82 U2.10
I2C_PW
  Top 0.15: C1.1 156.78,3.25 155.74,3.25 C2.1 155.74,3.32 154.57,4.5 R2-PINH.2 | R2-PINH.2 154.63,4.57 153.6,4.57 R1_PINH.2 153.53,4.57 149.37,4.57 119.59,34.35 119.59,36.98 90.37,66.2 86.28,66.2 85.45,65.37 22.58,65.37 21.88,66.06 21.88,66.34 U2.17 | SENSOR2.6 155.6,7.41 155.6,5.61 154.63,4.64 R2-PINH.2
INT_RTC  (via drill 0.3)
  Top 0.15: R1_PINH1.1 87.25,63.57 87.25,63.43 86.49,62.67 86.49,61.49 U5.3 | 86.36,61.01 86.42,61.08 86.42,61.42 U5.3 | 86.36,61.01 85.52,60.18 79.78,60.18 79.01,60.94 34.14,60.94 33.73,60.52 28.18,60.52 16.76,49.1 16.76,48.89 U2.8 | v106.02,53.6 124.37,53.6 TP15.TP | 86.36,61.01 v87.39,59.97 | 86.36,61.01 U5.3
  Bottom 0.15: v106.02,53.6 95.08,53.6 88.71,59.97 v87.39,59.97
IO/BOOT
  Top 0.15: R_BOOT.2 20.64,109.42 22.02,109.42 22.23,109.62 BOOT_BUTTON.4 22.3,109.69 25.76,109.69 BOOT_BUTTON.3 25.83,109.69 27.42,108.1 C6.1 27.49,107.96 29.02,106.44 29.02,71.05 24.38,66.41 U2.15
IO/CHANGE  (via drill 0.3)
  Top 0.15: C10.1 67.38,108.17 67.24,108.17 65.72,109.69 CHANGE_BUTTON.3 65.65,109.69 62.26,109.69 CHANGE_BUTTON.4 62.19,109.62 61.98,109.42 61.29,109.42 | 61.29,109.42 60.66,109.42 R_CHANGE.2 | v22.71,64.13 16.2,64.13 14.27,66.06 14.27,66.34 U2.23 | v27.35,68.77 27.35,68.97 30.33,71.95 30.33,76.66 61.29,107.61 61.29,109.42
  Bottom 0.15: v27.35,68.77 v22.71,64.13
MISO  (via drill 0.3)
  Top 0.15: v30.33,58.66 32.13,58.66 U3.2 32.2,58.72 v32.76,59.28 | v22.99,67.45 21.19,67.45 20.64,68 16.69,68 | 16.69,68 10.53,68 9.14,66.62 9.14,66.41 U2.27 | v6.92,93.97 6.58,93.63 5.82,93.63 J4.P7 | 16.69,68 v16.69,77.08 | v97.71,61.91 123.33,61.91 125.76,59.49 147.71,59.49 TP6.TP
  Bottom 0.15: v30.33,58.66 27.56,58.66 22.23,63.99 22.23,66.69 v22.99,67.45 | v6.92,93.97 6.92,86.84 v16.69,77.08 | v97.71,61.91 35.39,61.91 v32.76,59.28
MOSI  (via drill 0.3)
  Top 0.15: v26.52,60.32 15.51,49.31 15.51,48.89 U2.7 | v26.52,66.55 31.44,71.47 TP7.TP | v7.55,89.19 5.82,89.19 J4.P3 | v82.96,16 83.52,16 84.69,14.82 J1.14 | v41.83,54.29 40.03,56.09 U3.5 | v30.82,56.85 30.82,56.3 v32.83,54.29
  Bottom 0.15: v7.55,89.19 27.84,68.9 27.84,67.93 26.52,66.62 v26.52,66.55 v26.52,60.32 29.29,60.32 30.82,58.79 v30.82,56.85 | v82.96,16 80.12,16 v41.83,54.29 v32.83,54.29
N$1
  Top 0.15: R2-USB1.2 155.88,43 155.88,43.77 160.73,48.61 160.73,49.86 163.91,53.05 164.47,53.05 J2.A5
N$2
  Top 0.15: 123.51,33.55 123.89,33.17 C1_BAT1.1 | 123.51,33.55 122.16,34.9 122.16,35.11 D2.1 | 123.51,33.55 125.07,35.11 IC4.3 124.93,35.04 123.75,36.22 123.75,36.49 124.3,37.05 125.07,37.05 IC4.1 125.14,37.12 126.38,38.36 130.88,38.36 135.25,42.73 136.01,42.73 Q1.2
N$3
  Top 0.15: R1_BAT.1 123.68,45.84 123.89,45.84 124.51,45.22 125.41,45.22 126.24,46.05 126.24,46.12 126.38,46.26 128.87,46.26 129.36,45.77 129.64,45.77 U1.1
N$4
  Top 0.15: 89.33,29.29 89.19,29.15 D4.1 89.33,29.29 | 89.33,29.29 90.44,30.4 96.47,30.4 96.67,30.19 96.67,29.36 95.98,28.67 95.98,28.53 C4.1 | 89.33,29.29 85.25,33.38 D3.2
N$5
  Top 0.15: CHG_LED.C 123.96,47.78 123.96,46.88 124.93,45.91 R1_BAT.2
N$6
  Top 0.15: J1.24 79.64,14.47 75.83,14.47 73.68,16.62 EPD_C12.1
N$7
  Top 0.15: R2_BAT.2 128.11,43.28 128.11,44.67 127.07,45.7 U1.5
N$8
  Top 0.15: SENSOR2.8 154.01,7.48 154.01,8.45 154.77,9.21 154.77,10.32 SENSOR2.2
N$9
  Top 0.15: C_DELAY.1 52.08,102.84 51.87,102.84 50.69,104.01 IC1.5
N$10
  Top 0.15: J1.22 80.68,14.47 80.68,18.28 79.29,19.67 EPD_C10.1
N$11
  Top 0.15: J1.20 81.72,14.47 81.72,18.49 82.82,19.6 EPD_C8.1
N$13
  Top 0.15: J1.19 82.2,17.24 84.55,19.6 EPD_C7.1
N$14  (via drill 0.3)
  Top 0.15: v153.94,45.57 154.57,44.94 R2-USB.1 | v163.5,55.95 163.78,55.95 163.91,56.09 164.47,56.09 J2.B5
  Bottom 0.15: v153.94,45.57 153.94,46.4 v163.5,55.95
N$15
  Top 0.15: J1.18 82.68,14.47 82.68,15.65 82.48,15.86 82.48,16.69 84.83,19.04 85.73,19.04 86.28,19.6 EPD_C6.1
N$16
  Top 0.15: R10.1 68.97,8.45 68.97,7.69 68.07,6.79 47.99,6.79 6.51,48.27 6.51,67.1 4.43,69.18 4.43,91.06 4.02,91.48 4.02,94.32 6.09,96.4 9.56,96.4 11.98,98.82 13.57,98.82 14.27,98.13 D8.2
N$17  (via drill 0.3)
  Top 0.15: v9.14,96.88 9.14,99.37 R9.1 | v6.44,82.61 6.44,67.59 6.92,67.1 6.92,48.27 11.43,43.77 23.06,43.77 30.33,51.04 31.79,51.04 32.48,51.73 D6.2
  Bottom 0.15: v9.14,96.88 6.44,94.18 v6.44,82.61
N$18
  Top 0.15: R_RESET.2 45.57,109.42 46.95,109.42 47.16,109.62 RESET_BUTTON.4 47.23,109.69 50.69,109.69 RESET_BUTTON.3 50.76,109.69 52.35,108.1 C5.1
N$19  (via drill 0.3)
  Top 0.15: v51.45,25.21 48.27,25.21 R5.1 | v73.96,21.54 74.65,21.54 74.93,21.81 76.24,21.81 76.94,21.12 D9.2
  Bottom 0.15: v51.45,25.21 70.29,25.21 v73.96,21.54
N$20
  Top 0.15: R6.1 46.26,25.28 46.26,25.41 47.44,26.59 47.44,29.92 48.06,30.54 D10.2
N$21
  Top 0.15: R7.1 40.51,25.28 40.79,25.28 46.05,30.54 D11.2
N$22
  Top 0.15: R8.1 30.75,50.28 30.75,40.1 40.23,30.61 D12.2
N$23
  Top 0.15: J1.5 89.26,14.47 89.26,18.91 89.96,19.6 EPD_C2.1
N$24
  Top 0.15: J1.4 89.75,14.47 89.75,17.8 91.55,19.6 91.76,19.6 EPD_C1.1
N$32
  Top 0.15: D7.1 86.91,65.16 88.02,64.06 88.02,62.74 88.43,62.33 88.43,56.37 91.48,53.32 R_CAPACITOR.2
PREVGH
  Top 0.15: EPD_C9.1 81.16,19.67 81.16,14.47 J1.21 81.23,14.4 81.23,14.06 82.55,12.74 90.37,12.74 92.45,14.82 92.45,21.4 89.12,24.72 89.12,25.35 D5.1
PREVGL
  Top 0.15: EPD_C11.1 75.07,16.62 78.39,16.62 80.19,14.82 J1.23 80.26,14.4 80.26,14.06 81.85,12.46 90.51,12.46 93.35,15.3 93.35,25.9 92.66,26.59 92.66,29.09 D4.2
RESE  (via drill 0.3)
  Top 0.15: v90.79,18.21 90.23,17.66 90.23,14.47 J1.3 | v78.05,24.86 78.05,24.24 Q3.2 78.05,24.17 76.11,24.17 R3.1
  Bottom 0.15: v90.79,18.21 89.47,18.21 82.34,25.35 78.53,25.35 v78.05,24.86
RESE'
  Top 0.15: SJ1.2 67.24,8.38 67.24,10.32 R2.2 67.24,10.39 67.24,15.51 75.14,23.41 75.14,24.31 76.04,25.21 76.04,25.35 R3.2
RESET  (via drill 0.3)
  Top 0.15: v47.64,104.78 47.78,104.64 47.78,104.08 IC1.1 | v9.49,50 10.39,49.1 10.39,48.89 U2.3
  Bottom 0.15: v47.64,104.78 31.92,104.78 28.88,107.82 19.46,107.82 4.99,93.35 4.99,92.31 4.22,91.55 4.22,55.26 v9.49,50
RTC_RST  (via drill 0.3)
  Top 0.15: v28.53,71.19 27.77,70.43 26.94,70.43 23.13,66.62 23.13,66.41 U2.16 | v36.98,62.74 84.21,62.74 85.18,61.77 85.18,61.49 U5.4
  Bottom 0.15: v36.98,62.74 v28.53,71.19
RX
  Top 0.15: U2.24 12.95,66.06 15.37,63.64 84.14,63.64 86.42,65.93 90.23,65.93 98.75,57.41 98.75,21.61 TP2.TP
SCK  (via drill 0.3)
  Top 0.15: v25.48,70.57 26.52,71.61 TP8.TP | U2.6 14.27,48.89 14.27,53.12 v21.95,60.8 33.59,60.8 34.21,61.42 v36.01,61.42 | v4.71,91.41 5.75,91.41 J4.P5 | v83.24,16.83 85.18,14.89 85.18,14.47 J1.13 | v43.14,54.29 40.03,57.41 U3.6 39.96,57.48 v39.4,58.03
  Bottom 0.15: v21.95,60.8 21.95,67.03 23.03,68.11 | v25.48,70.57 23.03,68.11 | v4.71,91.41 4.71,83.72 12.33,76.11 15.03,76.11 23.03,68.11 | v83.24,16.83 80.61,16.83 v43.14,54.29 | v39.4,58.03 v36.01,61.42
SCL  (via drill 0.3)
  Top 0.15: SENSOR2.4 156.44,10.32 157.47,9.28 157.47,2.77 157.34,2.63 155.19,2.63 154.98,2.84 154.98,2.91 R2-PINH.1 154.63,3.32 154.15,3.81 153.04,3.81 152.9,3.67 152.9,2.84 153.67,2.08 157.61,2.08 166.55,11.01 166.55,19.94 165.65,20.84 165.37,20.84 J3.4 165.3,20.91 v165.3,24.1 | v139.19,50.21 138.5,50.21 U4.7 | v32.06,64.13 31.58,64.61 19.53,64.61 18.07,66.06 18.07,66.34 U2.20 | v86.36,54.02 87.6,54.02 88.99,52.63 88.99,52.15 U5.16 89.06,52.08 v89.68,51.45
  Bottom 0.15: v165.3,24.1 140.13,49.27 | 140.13,49.27 v139.19,50.21 | v32.06,64.13 32.06,59.62 31.99,59.55 31.99,59 35.39,55.61 84.76,55.61 v86.36,54.02 | 140.13,49.27 126.17,35.32 105.81,35.32 v89.68,51.45
SDA  (via drill 0.3)
  Top 0.15: 157.75,10.11 157.75,2.63 157.47,2.35 154.43,2.35 153.6,3.19 R1_PINH.1 | 157.75,10.11 156.71,11.15 156.16,11.15 155.67,10.66 155.67,10.39 SENSOR2.3 | v139.82,50.21 139.33,50.69 138.5,50.69 U4.8 138.43,50.69 138.08,50.69 131.51,57.27 v102.35,57.27 | v164.4,25.62 164.4,20.5 165.02,19.88 165.3,19.88 J3.3 165.37,19.8 165.65,19.8 166.27,19.18 166.27,17.52 158.86,10.11 157.75,10.11 | v32.06,64.75 31.92,64.89 20.5,64.89 19.32,66.06 19.32,66.34 U2.19 | v87.46,53.53 87.46,52.35 87.67,52.15 U5.15
  Bottom 0.15: v164.4,25.62 v139.82,50.21 | v32.06,64.75 32.55,64.26 32.55,59.69 32.27,59.42 32.27,59.14 35.52,55.88 85.11,55.88 | v87.46,53.53 85.11,55.88 | v102.35,57.27 91.83,57.27 88.64,60.45 87.25,60.45 85.11,58.31 85.11,55.88
SRC
  Top 0.15: Q3.3 80.26,24.93 80.26,27.42 81.02,28.18 L1.1 81.09,28.32 83.93,31.16 86.22,31.16 88.36,29.02 88.36,28.6 88.5,28.46 91.83,28.46 | 91.83,28.46 91.83,26.11 92.52,25.41 D5.2 | 91.83,28.46 91.83,29.57 92.03,29.78 95.91,29.78 C4.2
SS_SD
  Top 0.15: J4.P2 6.23,88.09 7.2,87.12 7.2,53.6 11.63,49.17 11.63,48.89 U2.4
TX  (via drill 0.3)
  Top 0.15: v11.7,58.59 11.7,66.34 U2.25 | v95.43,12.12 104.64,21.33 TP1.TP
  Bottom 0.15: v11.7,58.59 11.7,49.24 48.82,12.12 v95.43,12.12
USB_D+  (via drill 0.3)
  Top 0.15: v152.35,48.68 153.39,48.68 D1.1 | v30.4,53.53 30.19,53.53 25.55,48.89 24.38,48.89 U2.14
  Bottom 0.15: v152.35,48.68 141.96,48.68 139.95,50.69 139.05,50.69 127.56,39.2 127.56,37.74 125.69,35.87 106.3,35.87 89.12,53.05 45.43,53.05 43.42,55.05 31.92,55.05 v30.4,53.53
USB_D-  (via drill 0.3)
  Top 0.15: v137.88,47.64 151.52,47.64 152.35,46.81 153.39,46.81 D1.3 | v31.51,54.02 30.26,54.02 26.11,49.86 23.89,49.86 23.13,49.1 23.13,48.89 U2.13
  Bottom 0.15: v137.88,47.64 125.83,35.59 106.16,35.59 88.99,52.77 45.29,52.77 43.28,54.78 32.27,54.78 v31.51,54.02
VBAT  (via drill 0.3)
  Top 0.3: U4.3 136.49,49.72 136.49,50.14 U4.2 136.35,50.21 134.9,50.21 134.41,50.69 132.27,50.69 132.06,50.48 132.06,49.51 | Q1.3 135.04,44.87 135.04,46.47 132.82,48.68 C2_BAT.1 132.75,48.82 132.06,49.51 | 132.06,49.51 131.92,49.44 130.12,47.64 129.71,47.64 U1.3 129.57,47.71 v125.55,51.73 | v12.4,76.66 8.93,76.66 TP3.TP | v28.53,75.83 v17.17,75.83
  Bottom 0.3: v12.4,76.66 16.34,76.66 v17.17,75.83 | v28.53,75.83 83.03,75.83 96.4,62.46 114.82,62.46 v125.55,51.73
VBUS  (via drill 0.3)
  Top 0.3: 136.7,43.35 136.7,42.17 134.97,40.44 134.97,36.91 R1_PWRUSB.2 | 136.7,43.35 136.56,43.49 134.83,43.49 134.14,42.8 Q1.1 134,42.87 131.85,42.87 v131.16,43.56 | 153.39,46.12 156.64,46.12 156.85,46.33 156.85,47.16 156.47,47.54 | 153.39,46.12 152.49,46.12 151.59,47.02 150.97,47.02 C5_USB.1 150.83,46.95 147.29,43.42 136.84,43.42 136.7,43.35 | 156.47,47.54 156.37,47.64 155.95,47.64 D1.5 | 156.47,47.54 157.82,48.89 C4_USB.1 | 153.39,46.12 153.39,42.94 154.08,42.24 154.15,42.24 155.95,40.44 PFMF.050.1.2 | D2.2 122.09,37.33 122.09,45.64 120.5,47.23 120.5,47.85 C1_BAT.1 | C1_BAT.1 120.56,47.99 121.19,48.61 124.37,48.61 125.07,47.92 125.27,47.92 CHG_LED.A 125.41,47.78 126.87,47.78 127,47.64 U1.4 127.14,47.58 v127.77,46.95 | TP14.TP 82.68,70.22 88.64,70.22 110.87,47.99 120.36,47.99 C1_BAT.1
  Bottom 0.3: v127.77,46.95 v131.16,43.56
VRTC  (via drill 0.3)
  Top 0.3: 92.38,51.94 93.63,51.94 93.9,51.66 C10_SUPERCAP.2 | 92.38,51.94 91.55,51.94 R_CAPACITOR.1 91.41,51.87 90.37,50.83 87.32,50.83 86.49,51.66 86.49,52.08 U5.14 | v91.55,56.51 91.55,61.49 C8.1 | v92.38,52.08 92.38,51.94
  Bottom 0.3: v91.55,56.51 91.55,52.91 v92.38,52.08
VUSB  (via drill 0.3)
  Top 0.3: J2.A9 164.54,56.85 164.54,56.65 J2.B4 164.68,56.58 165.16,56.58 v165.44,56.3 | J2.A4 164.54,51.87 164.54,52.08 J2.B9 164.68,52.15 165.44,52.15 | 165.44,52.15 165.78,52.15 166.41,51.52 166.41,47.85 156.85,38.3 153.6,38.3 151.52,40.37 PFMF.050.1.1 | v165.44,52.28 165.44,52.15
  Bottom 0.3: v165.44,52.28 v165.44,56.3